# EAGLE board Adafruit BMP280 (EAGLE 6.4)
REV: B
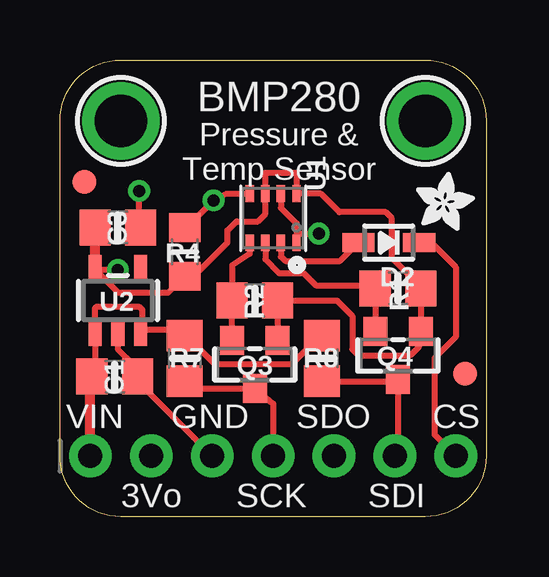
[diagram p0: board, top side]
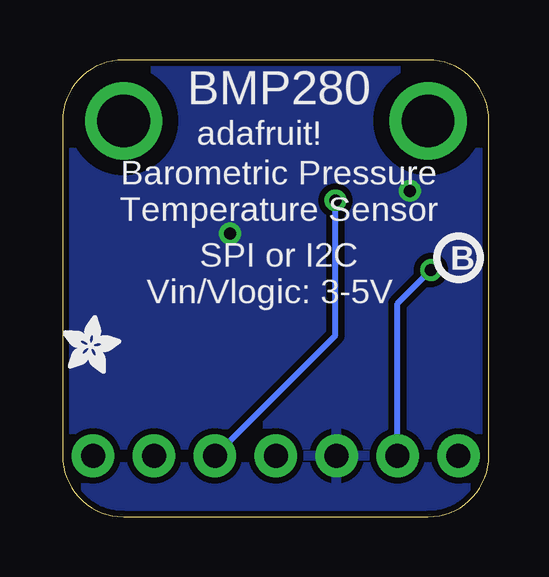
[diagram p1: board, bottom side, seen from below]

Size 17.78 x 19.05 mm. Coordinates in mm from the lower left corner, seen from the top.
Outline: 15.24,0 2.54,0 arc-90 0,2.54 0,16.51 arc-90 2.54,19.05 15.24,19.05 arc-90 17.78,16.51 17.78,2.54 arc-90 15.24,0
Copper layers (1*16): Top 0.035mm / dielectric 1.5mm / Bottom 0.035mm
Design rules "adafruit": minimum track width 8mil, minimum drill 15.5mil, track to track 8mil, track to pad 8mil, pad to pad 8mil, via to via 8mil, smd to smd 8mil, copper to edge 10mil, drill to drill 8mil, minimum pad ring 10mil, minimum via ring 8mil, stop-mask expansion 2mil, vias tented up to drill 20mil, thermal gap 10mil

## Footprints (pad centres in the part's own frame; a part is rotated, then mirrored left to right if it is on the bottom)
0805-NO = smd 1.3 x 1.5: 1 -0.95,0; 2 0.95,0
SOD-323 = smd 1.35 x 0.8: A 1.27,0; C -1.27,0
1X07_ROUND_70 = drill 1 pad 1.778: 1 -7.62,0; 2 -5.08,0; 3 -2.54,0; 4 0,0; 5 2.54,0; 6 5.08,0; 7 7.62,0
SOT23-WIDE = smd 1 x 1.2: 1 -0.95,-1; 2 0.95,-1; 3 0,1
_0805MP = smd 1.2 x 1.3: 1 -1.016,0; 2 1.016,0
BME280 = smd 0.7 x 0.35: 1 1.025,0.975; 2 1.025,0.325; 3 1.025,-0.325; 4 1.025,-0.975; 5 -1.025,-0.975; 6 -1.025,-0.325; 7 -1.025,0.325; 8 -1.025,0.975
SOT23-5 = smd 0.55 x 1.2: 1 -0.95,-1.3; 2 0,-1.3; 3 0.95,-1.3; 4 0.95,1.3; 5 -0.95,1.3
FIDUCIAL_1MM = smd 1 x 1: 1 0,0
MOUNTINGHOLE_2.0_PLATED = drill 2.2 pad 3: P$1 0,0

## Placement (x,y rotation side)
C1  10uF  [0805-NO]  2.29,5.84 0 top
C3  10uF  [0805-NO]  2.41,12.06 0 top
D2  1N4148  [SOD-323]  13.72,11.43 180 top
JP2  [1X07_ROUND_70]  8.89,2.54 0 top
Q3  BSS138  [SOT23-WIDE]  8.13,6.35 180 top
Q4  BSS138  [SOT23-WIDE]  14.1,6.73 180 top
R1  10K  [0805-NO]  14.1,9.53 0 top
R2  10K  [0805-NO]  8.13,9.02 0 top
R4  10K  [_0805MP]  5.21,11.05 270 top
R7  10K  [0805-NO]  5.21,6.6 90 top
R8  10K  [0805-NO]  10.92,6.6 90 top
U1  BME280  [BME280]  8.89,12.45 270 top
U2  MIC5225-3.3  [SOT23-5]  2.41,9.02 0 top
U$2  [ADAFRUIT_2.5MM]  17.78,5.97 0 bottom
U$5  FIDUCIAL""  [FIDUCIAL_1MM]  1.02,13.97 0 top
U$6  [ADAFRUIT_2.5MM]  14.86,11.94 0 top
U$7  MOUNTINGHOLE2.0  [MOUNTINGHOLE_2.0_PLATED]  2.54,16.51 0 top
U$8  MOUNTINGHOLE2.0  [MOUNTINGHOLE_2.0_PLATED]  15.24,16.51 0 top
U$15  FIDUCIAL""  [FIDUCIAL_1MM]  16.89,5.97 0 top
U$20  [PCBFEAT-REV-040]  1.27,10.79 0 bottom

## Library data of the parts
C1 C3 D2 JP2 Q3 Q4 R1 R2 R4 R7 R8 U1 U2 U$2 U$6 U$20 = microbuilder
U$5 U$7 U$8 U$15 = microbuilder; BOM: EXCLUDE

## Nets
3.3V: C3.1 JP2.2 Q3.1 Q4.1 R1.2 R2.2 R4.2 U1.6 U1.8 U2.5
5.0V: C1.1 JP2.1 R7.2 R8.2 U2.1 U2.3
CS_3V: D2.A U1.2
CS_5V: D2.C JP2.7
GND: C1.2 C3.2 JP2.3 U1.1 U1.7 U2.2
SCK/SCL_5V: JP2.4 Q3.3 R7.1
SCK_3V: Q3.2 R2.1 U1.4
SDI/SDA_5V: JP2.6 Q4.3 R8.1
SDI_3V: Q4.2 R1.1 U1.3
SDO/ADR_3V: JP2.5 R4.1 U1.5

## Tracks (layer width: path | path; a pad name or v marks a point on that pad's centre or on a via)
3.3V  (via drill 0.5)
  Top 0.254: Q3.1 R2.2 11.56,9.02 12.19,8.38 12.19,6.99 12.45,6.73 14.61,6.73 14.99,7.11 14.99,7.67 Q4.1 R1.2 15.05,9.59 13.84,10.79 13.84,12.45 13.59,12.7 11.65,12.7 10.88,13.47 U1.8 9.87,14.35 8.56,14.35 U1.6 8.56,12.63 8.26,12.32 7.37,12.32 6.99,11.94 6.99,11.43 5.59,10.03 R4.2 4.51,9.34 2.45,9.34 U2.5 1.49,10.29 v2.41,10.29
  Top 0.406: U2.5 C3.1
  Bottom 0.254: JP2.2 3.81,8.89 v2.41,10.29
5.0V
  Top 0.254: 3.43,7.78 3.43,8.64 3.3,8.76 1.52,8.76 1.46,8.7 U2.1 1.46,5.84 C1.1 1.27,5.84 1.27,5.65 | 3.43,7.78 U2.3 | 3.43,7.78 3.45,7.81 5.21,7.81 R7.2 5.27,7.55 6.48,6.35 9.65,6.35 10.98,7.68 R8.2
  Top 0.406: JP2.1 1.27,5.65
CS_3V
  Top 0.254: U1.2 9.21,10.85 9.4,10.67 11.68,10.67 D2.A
CS_5V
  Top 0.254: D2.C 15.49,11.43 16.51,10.41 16.51,7.49 15.62,6.6 15.62,3.43 JP2.7
GND  (via drill 0.5)
  Top 0.254: U1.7 9.21,12.88 9.87,12.23 9.87,11.86 | 9.87,11.86 U1.1 | C3.2 3.3,12.13 v3.3,13.59 | U2.2 2.41,6.99 3.05,6.35 3.05,6.03 C1.2 3.24,5.65 JP2.3 | 9.87,11.86 9.91,11.81 v10.79,11.81
  Bottom 0.254: v3.3,13.59 3.17,13.72 3.05,13.72 | v10.79,11.81 11.05,11.68
  pour Bottom (isolate 0.254): 0,19.05 17.78,19.05 17.91,0 0.13,0
SCK/SCL_5V
  Top 0.254: R7.1 5.64,5.35 Q3.3 8.89,4.71 JP2.4
SCK_3V
  Top 0.254: Q3.2 R2.1 7.18,10.48 7.92,10.96 U1.4
SDI/SDA_5V
  Top 0.254: JP2.6 14.1,2.67 Q4.3 14.05,5.65 R8.1
SDI_3V
  Top 0.254: Q4.2 R1.1 13.02,9.65 10.67,9.65 10.16,10.16 9.14,10.16 8.56,10.74 U1.3
SDO/ADR_3V  (via drill 0.5)
  Top 0.254: U1.5 6.93,13.47 v6.4,13.19 5.27,12.06 R4.1
  Bottom 0.254: JP2.5 6.4,7.57 v6.4,13.19

## Text on the board
tPlace: BMP280 | Pressure & / Temp Sensor | VIN | GND | SDO | CS | 3Vo | SCK | SDI
bPlace: BMP280 | adafruit! | Barometric Pressure / Temperature Sensor | SPI or I2C | Vin/Vlogic: 3-5V